# EAGLE board schema_v4_0_SMD_DIP (EAGLE 6.2)
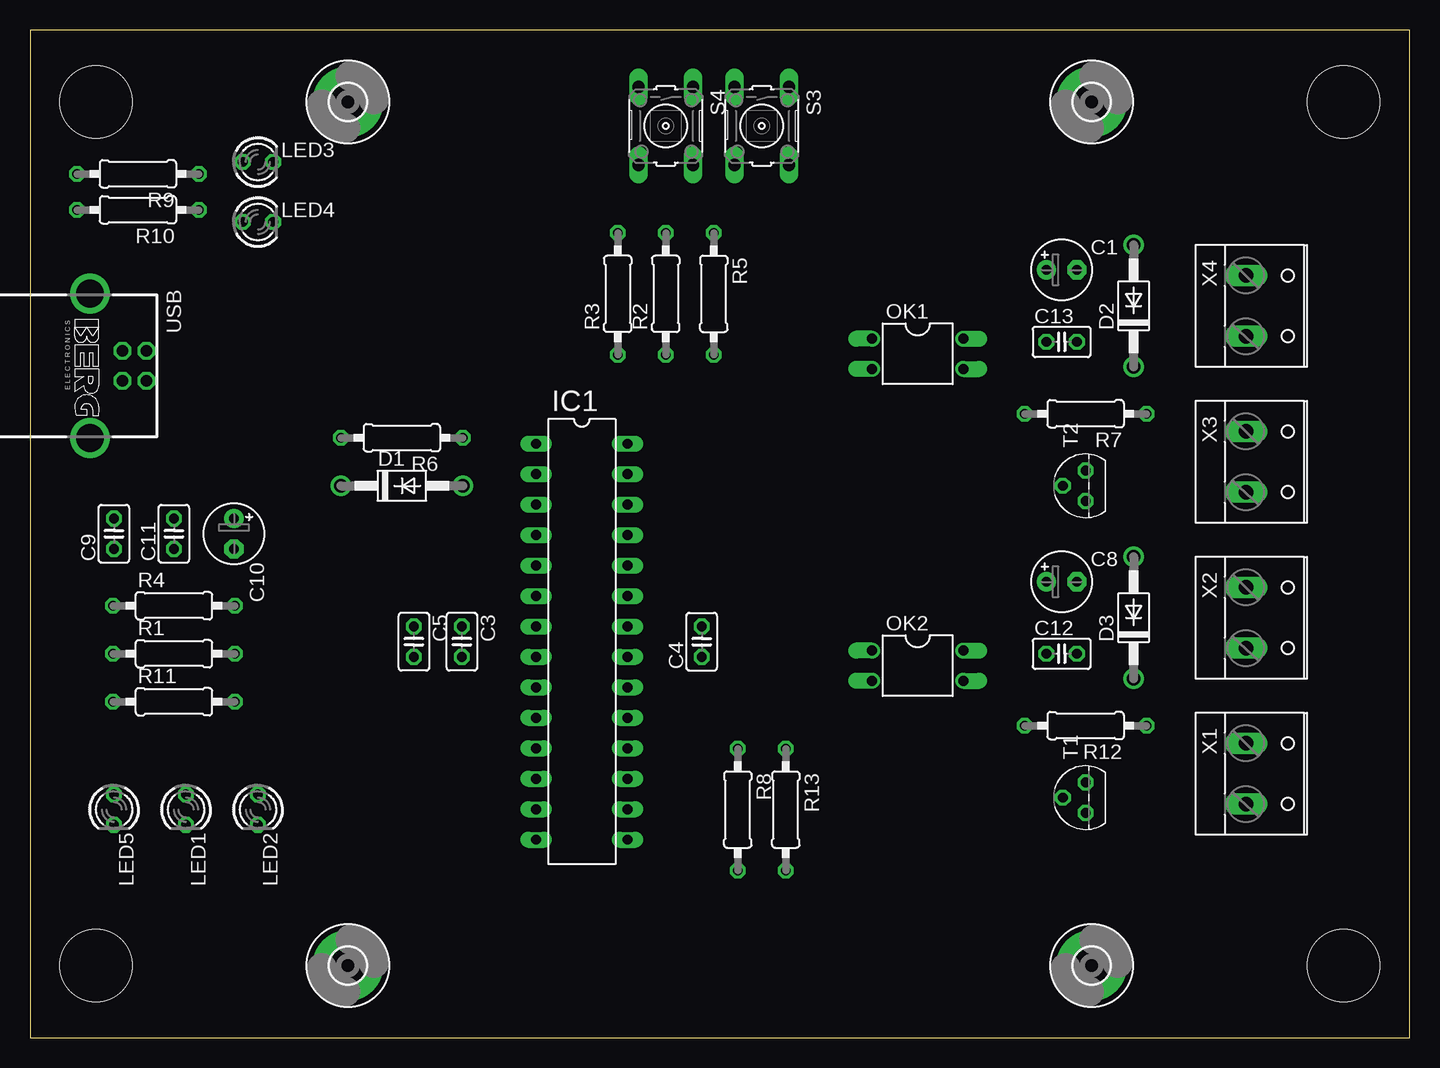
[diagram p0: board, top side]
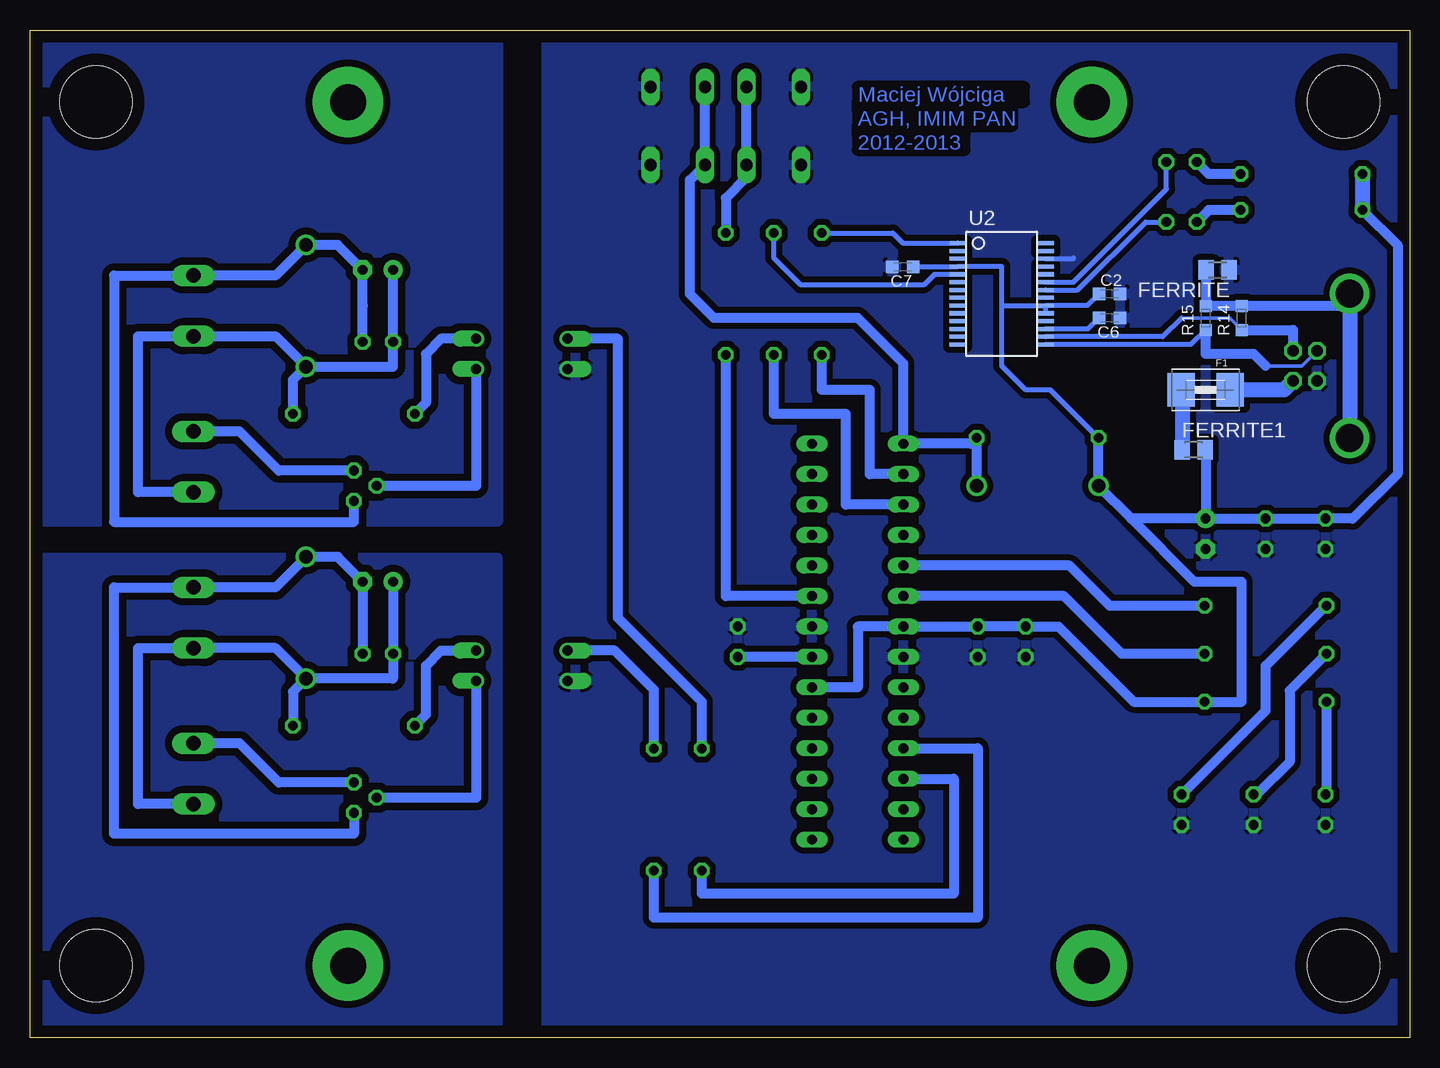
[diagram p1: board, bottom side, seen from below]

Size 115 x 84 mm. Coordinates in mm from the lower left corner, seen from the top.
Outline: 0,0 115,0 115,84 0,84 0,0
Copper layers (1*16): Top 0.035mm / dielectric 1.5mm / Bottom 0.035mm
Design rules: minimum track width 10mil, minimum drill 24mil, track to track 8mil, track to pad 8mil, pad to pad 8mil, via to via 8mil, smd to smd 8mil, copper to edge 40mil, drill to drill 8mil, minimum pad ring 10mil, minimum via ring 8mil, stop-mask expansion 4mil, vias tented up to drill 0mil, thermal gap 10mil
Net classes: 0 default: width 0.203 mm
Holes 6 mm at 109.5,78 109.5,6 5.5,6 5.5,78

## Footprints (pad centres in the part's own frame; a part is rotated, then mirrored left to right if it is on the bottom)
E2,5-5 = drill 0.813 pad 1.6: + -1.27,0 | drill 0.813 pad 1.6 octagon: - 1.27,0
C0603K = smd 1.05 x 1.08: 1 -0.875,0; 2 0.875,0
C025-025X050 = drill 0.813 octagon: 1 -1.27,0; 2 1.27,0
DO41-10 = drill 1.118: A 5.08,0; C -5.08,0
1812 = smd 2.286 x 2.794: 1 -2.046,0; 2 2.046,0
M0805 = smd 1.3 x 1.6: 1 -0.95,0; 2 0.95,0
3,0-PAD = drill 3 pad 5.842: B3,0 0,0
DIL28-3 = drill 0.813 long: 1 -16.51,-3.81; 2 -13.97,-3.81; 3 -11.43,-3.81; 4 -8.89,-3.81; 5 -6.35,-3.81; 6 -3.81,-3.81; 7 -1.27,-3.81; 8 1.27,-3.81; 9 3.81,-3.81; 10 6.35,-3.81; 11 8.89,-3.81; 12 11.43,-3.81; 13 13.97,-3.81; 14 16.51,-3.81; 15 16.51,3.81; 16 13.97,3.81; 17 11.43,3.81; 18 8.89,3.81; 19 6.35,3.81; 20 3.81,3.81; 21 1.27,3.81; 22 -1.27,3.81; 23 -3.81,3.81; 24 -6.35,3.81; 25 -8.89,3.81; 26 -11.43,3.81; 27 -13.97,3.81; 28 -16.51,3.81
LED3MM = drill 0.813 octagon: A -1.27,0; K 1.27,0
DIL04 = drill 0.813 offset: 1 -1.27,-3.81; 2 1.27,-3.81; 3 1.27,3.81; 4 -1.27,3.81
0207/10 = drill 0.813 octagon: 1 -5.08,0; 2 5.08,0
CT/CN0603 = smd 1 x 1: 1 -1,0; 2 1,0
B3F-10XX = drill 1.016 long: 1 -3.251,2.261; 2 3.251,2.261; 3 -3.251,-2.261; 4 3.251,-2.261
TO92 = drill 0.813 octagon: 1 1.27,0; 2 0,1.905; 3 -1.27,0
SSOP28DB = smd 0.348 x 1.397: 1 -4.225,-3.656; 2 -3.575,-3.656; 3 -2.925,-3.656; 4 -2.275,-3.656; 5 -1.625,-3.656; 6 -0.975,-3.656; 7 -0.325,-3.656; 8 0.325,-3.656; 9 0.975,-3.656; 10 1.625,-3.656; 11 2.275,-3.656; 12 2.925,-3.656; 13 3.575,-3.656; 14 4.225,-3.656; 15 4.225,3.656; 16 3.575,3.656; 17 2.925,3.656; 18 2.275,3.656; 19 1.625,3.656; 20 0.975,3.656; 21 0.325,3.656; 22 -0.325,3.656; 23 -0.975,3.656; 24 -1.625,3.656; 25 -2.275,3.656; 26 -2.925,3.656; 27 -3.575,3.656; 28 -4.225,3.656
PN61729-S = drill 0.95 octagon: 1 1.25,4.71; 2 -1.25,4.71; 3 -1.25,2.71; 4 1.25,2.71 | drill 2.3 pad 2.9: S1 -6.02,0; S2 6.02,0
W237-132 = drill 1.194 long: 1 -2.54,-0.635; 2 2.54,-0.635

## Placement (x,y rotation side)
C1  1uF  [E2,5-5]  86,64 0 top
C2  100nF  [C0603K]  25,62 0 bottom
C3  100nF  [C025-025X050]  36,33 270 top
C4  100nF  [C025-025X050]  56,33 90 top
C5  100nF  [C025-025X050]  32,33 270 top
C6  100nF  [C0603K]  25,60 180 bottom
C7  100nF  [C0603K]  42.25,64.25 180 bottom
C8  1uF  [E2,5-5]  86,38 0 top
C9  100nF  [C025-025X050]  7,42 90 top
C10  1uF  [E2,5-5]  17,42 270 top
C11  100nF  [C025-025X050]  12,42 90 top
C12  100nF  [C025-025X050]  86,32 0 top
C13  100nF  [C025-025X050]  86,58 0 top
D1  1N4001  [DO41-10]  31,46 0 top
D2  1N4001  [DO41-10]  92,61 90 top
D3  1N4001  [DO41-10]  92,35 90 top
F1  [1812]  17,54 180 bottom
FERRITE  [M0805]  16,64 180 bottom
FERRITE1  [M0805]  18,49 0 bottom
H1  MOUNT-PAD-ROUND3.0  [3,0-PAD]  26.5,78 0 top
H2  MOUNT-PAD-ROUND3.0  [3,0-PAD]  88.5,78 0 top
H3  MOUNT-PAD-ROUND3.0  [3,0-PAD]  88.5,6 0 top
H4  MOUNT-PAD-ROUND3.0  [3,0-PAD]  26.5,6 0 top
IC1  MEGA8-P  [DIL28-3]  46,33 270 top
LED1  [LED3MM]  13,19 270 top
LED2  [LED3MM]  19,19 270 top
LED3  [LED3MM]  19,73 0 top
LED4  [LED3MM]  19,68 0 top
LED5  [LED3MM]  7,19 270 top
OK1  LTV816  [DIL04]  74,57 270 top
OK2  LTV816  [DIL04]  74,31 270 top
R1  330  [0207/10]  12,32 0 top
R2  1k  [0207/10]  53,62 90 top
R3  1k  [0207/10]  49,62 90 top
R4  330  [0207/10]  12,36 0 top
R5  10k  [0207/10]  57,62 270 top
R6  22k  [0207/10]  31,50 180 top
R7  10k  [0207/10]  88,52 180 top
R8  1k  [0207/10]  59,19 270 top
R9  330  [0207/10]  9,72 180 top
R10  330  [0207/10]  9,69 180 top
R11  330  [0207/10]  12,28 0 top
R12  10k  [0207/10]  88,26 180 top
R13  1k  [0207/10]  63,19 270 top
R14  VARISTORCN0603  [CT/CN0603]  14,60 90 bottom
R15  VARISTORCN0603  [CT/CN0603]  17,60 90 bottom
S3  [B3F-10XX]  61,76 270 top
S4  [B3F-10XX]  53,76 270 top
T1  BC547  [TO92]  88,20 90 top
T2  BC547  [TO92]  88,46 90 top
U2  [SSOP28DB]  34,62 270 bottom
USB  PN61729-S  [PN61729-S]  5,56 270 top
X1  [W237-132]  102,22 270 top
X2  [W237-132]  102,35 270 top
X3  [W237-132]  102,48 270 top
X4  [W237-132]  102,61 270 top

## Library data of the parts
C1-C13 R1-R13 = rcl
D1-D3 = diode
F1 = adafruit
FERRITE FERRITE1 = resistor
H1-H4 = holes
IC1 = atmel; OC_FARNELL: unknown; OC_NEWARK: unknown
LED1-LED5 = led
OK1 OK2 = optocoupler; OC_FARNELL: unknown; OC_NEWARK: unknown
R14 R15 = varistor
S3 S4 = switch-omron; MPN: B3F-1000; OC_FARNELL: 176432; OC_NEWARK: 36M3542
T1 T2 = transistor
U2 = ftdichip-5
USB = con-berg; OC_FARNELL: unknown; OC_NEWARK: unknown
X1-X4 = con-wago-508; OC_FARNELL: unknown; OC_NEWARK: unknown

## Nets
5V0: C2.1 C3.1 C5.1 C7.1 C9.2 C10.+ C11.2 D1.C FERRITE1.2 IC1.7 IC1.20 R6.2 R9.2 R10.2 R11.2 U2.4 U2.19 U2.20
AGND: U2.25
GND: C2.2 C3.2 C4.2 C5.2 C6.1 C7.2 C9.1 C10.- C11.1 FERRITE.1 IC1.8 IC1.22 LED1.K LED2.K LED5.K OK1.2 OK2.2 S3.1 S3.2 S4.3 S4.4 U2.26 USB.4
GND1: U2.7
GND2: U2.18
GND3: U2.21
MOTOR1: IC1.11 R13.2
MOTOR2: IC1.12 R8.2
N$1: IC1.3 R2.1
N$2: IC1.2 R3.1
N$3: C4.1 IC1.21
N$4: IC1.23 R5.2
N$5: LED1.A R1.1
N$6: LED2.A R4.1
N$7: D1.A IC1.1 R6.1 S3.3 S3.4
N$8: LED3.A R9.1
N$9: LED4.A R10.1
N$10: LED5.A R11.1
N$11: C1.+ C13.1 D2.C R7.1 X3.2 X4.2
N$12: OK2.1 R13.1
N$13: C1.- C13.2 D2.A T2.3 X4.1
N$14: OK1.3 T2.2
N$15: OK2.4 R12.2
N$16: T1.1 X1.1
N$17: C8.+ C12.1 D3.C R12.1 X1.2 X2.2
N$18: C8.- C12.2 D3.A T1.3 X2.1
N$19: OK2.3 T1.2
N$20: F1.1 USB.1
N$21: FERRITE.2 R14.2 R15.2 USB.S1 USB.S2
N$22: F1.2 FERRITE1.1
N$41: LED3.K U2.23
N$42: LED4.K U2.22
N$45: R5.1 S4.1 S4.2
N$46: IC1.6 R1.2
N$50: IC1.5 R4.2
N$96: C6.2 U2.17
N$102: OK1.1 R8.1
N$104: OK1.4 R7.2
N$107: T2.1 X3.1
RXD: R3.2 U2.1
TXD: R2.2 U2.5
USBDM: R14.1 U2.16 USB.2
USBDP: R15.1 U2.15 USB.3

## Tracks (layer width: path | path; a pad name or v marks a point on that pad's centre or on a via)
5V0
  Bottom 0.406: C7.1 41.35,64.28 U2.4 34,64.28 34,61 | U2.20 U2.19 | U2.20 30.34,61 34,61 | R6.2 29.92,54 32,54 34,56 34,61 | C2.1 26.85,61.02 U2.20
  Bottom 0.813: R6.2 D1.C 23.19,43.27 | FERRITE1.2 17,48.95 C10.+ | C10.+ C11.2 C9.2 4.73,43.27 1,47 1,66.08 R10.2 | C10.+ 23.19,43.27 | 23.19,43.27 17.92,38 14,38 14,28 R11.2 23,28 29.27,34.27 C5.1 C3.1 IC1.7 46,34.27 46,29.19 IC1.20
  Bottom 1.27: R9.2 R10.2
GND
  Bottom 0.406: U2.26 28.07,64.92 arc-90 28,65
  pour Bottom (isolate 0.5): 0,84 72,84 72,0 0,0
MOTOR1
  Bottom 0.813: IC1.11 36,24.11 36,10 63,10 R13.2
MOTOR2
  Bottom 0.813: IC1.12 38,21.57 38,12 59,12 R8.2
N$1
  Bottom 0.813: IC1.3 47,44.43 47,52 53,52 R2.1
N$2
  Bottom 0.813: IC1.2 45,46.97 45,54 49,54 R3.1
N$3
  Bottom 0.813: IC1.21 C4.1
N$4
  Bottom 0.813: IC1.23 57,36.81 R5.2
N$5
  Bottom 0.813: R1.1 10,28.92 10,23 12.73,20.27 LED1.A
N$6
  Bottom 0.813: LED2.A 12,27.27 12,31 7,36 R4.1
N$7
  Bottom 0.813: D1.A R6.1 36.57,49.51 IC1.1 42.19,56.19 46,60 58,60 60,62 60,71.49 S3.4 S3.3
N$8
  Bottom 0.813: R9.1 16.73,72 LED3.A
N$9
  Bottom 0.813: R10.1 16.73,69 LED4.A
N$10
  Bottom 0.813: R11.1 6.92,20.35 LED5.A
N$11
  Bottom 0.813: X3.2 106,45.46 106,58.46 X4.2 94.54,58.46 D2.C | R7.1 93.08,54.84 D2.C | D2.C 84.73,55.92 C13.1 C1.+
N$12
  Bottom 0.813: R13.1 63,29 66.27,32.27 OK2.1
N$13
  Bottom 0.813: 87.27,61 C13.2 C1.- 89.35,66.08 D2.A 94.54,63.54 X4.1 108,63.54 108,43 88,43 T2.3
N$14
  Bottom 0.813: OK1.3 77.81,46 T2.2
N$15
  Bottom 0.813: R12.2 82,26.92 82,31 80.73,32.27 OK2.4
N$16
  Bottom 0.813: T1.1 94.27,21.27 97.54,24.54 X1.1
N$17
  Bottom 0.813: C8.+ C12.1 84.73,29.92 D3.C | D3.C 94.54,32.46 X2.2 106,32.46 106,19.46 X1.2 | D3.C 93.08,28.84 R12.1
N$18
  Bottom 0.813: C12.2 C8.- 89.35,40.08 D3.A 94.54,37.54 X2.1 108,37.54 108,17 88,17 T1.3
N$19
  Bottom 0.813: OK2.3 77.81,20 T1.2
N$20
  Bottom 1.27: USB.1 10.46,54 F1.1
N$21
  Bottom 0.813: USB.S1 6.02,61 R14.2 R15.2 16.95,61.05 FERRITE.2
  Bottom 1.27: USB.S1 USB.S2
N$22
  Bottom 0.813: F1.2 18.95,53.9
  Bottom 1.27: 18.95,53.9 FERRITE1.1
N$23
  pour Bottom (isolate 0.61): 115,84 76,84 76,43 115,43
N$24
  pour Bottom (isolate 0.61): 115,0 76,0 76,40 115,40
N$41
  Bottom 0.406: U2.23 28.02,62.98 20.27,70.73 LED3.K
N$42
  Bottom 0.406: U2.22 27.68,62.33 22,68 LED4.K
N$45
  Bottom 0.813: S4.1 S4.2 55.26,71.74 57,70 R5.1
N$46
  Bottom 0.813: R1.2 24,32 28.81,36.81 IC1.6
N$50
  Bottom 0.813: R4.2 25,36 28.35,39.35 IC1.5
N$96
  Bottom 0.406: C6.2 26.8,59.08 U2.17
N$102
  Bottom 0.813: R8.1 59,28 66,35 66,58.27 OK1.1
N$104
  Bottom 0.813: OK1.4 80.73,58.27 82,57 82,52.92 R7.2
N$107
  Bottom 0.813: T2.1 94.27,47.27 97.54,50.54 X3.1
RXD
  Bottom 0.406: R3.2 43.08,67.08 42.25,66.25 37.68,66.25 U2.1
TXD
  Bottom 0.406: U2.5 39.62,63.62 40.5,62.75 50.75,62.75 53,65 R2.2
USBDM
  Bottom 0.305: R14.1 15,60 19,60
  Bottom 0.406: 19,60 20.57,58.42 U2.16
  Bottom 0.813: R14.1 9.71,59 USB.2
USBDP
  Bottom 0.305: USB.3 8.96,56 12,56
  Bottom 0.406: R15.1 18.23,57.77 U2.15
  Bottom 0.813: 12,56 13,57 17,57 R15.1

## Text on the board
Bottom: Maciej Wójciga | AGH, IMIM PAN | 2012-2013